# Altium PCB mcu_ecg_combine_board.PcbDoc
Units mm, origin at the board's own origin, x right, y up, seen from the top; angles counter-clockwise.
Board outline 38.86 x 39.12 mm, 2 copper layers (Top Layer, Bottom Layer); 5 components, 22 nets, 43 pads, 0 vias.
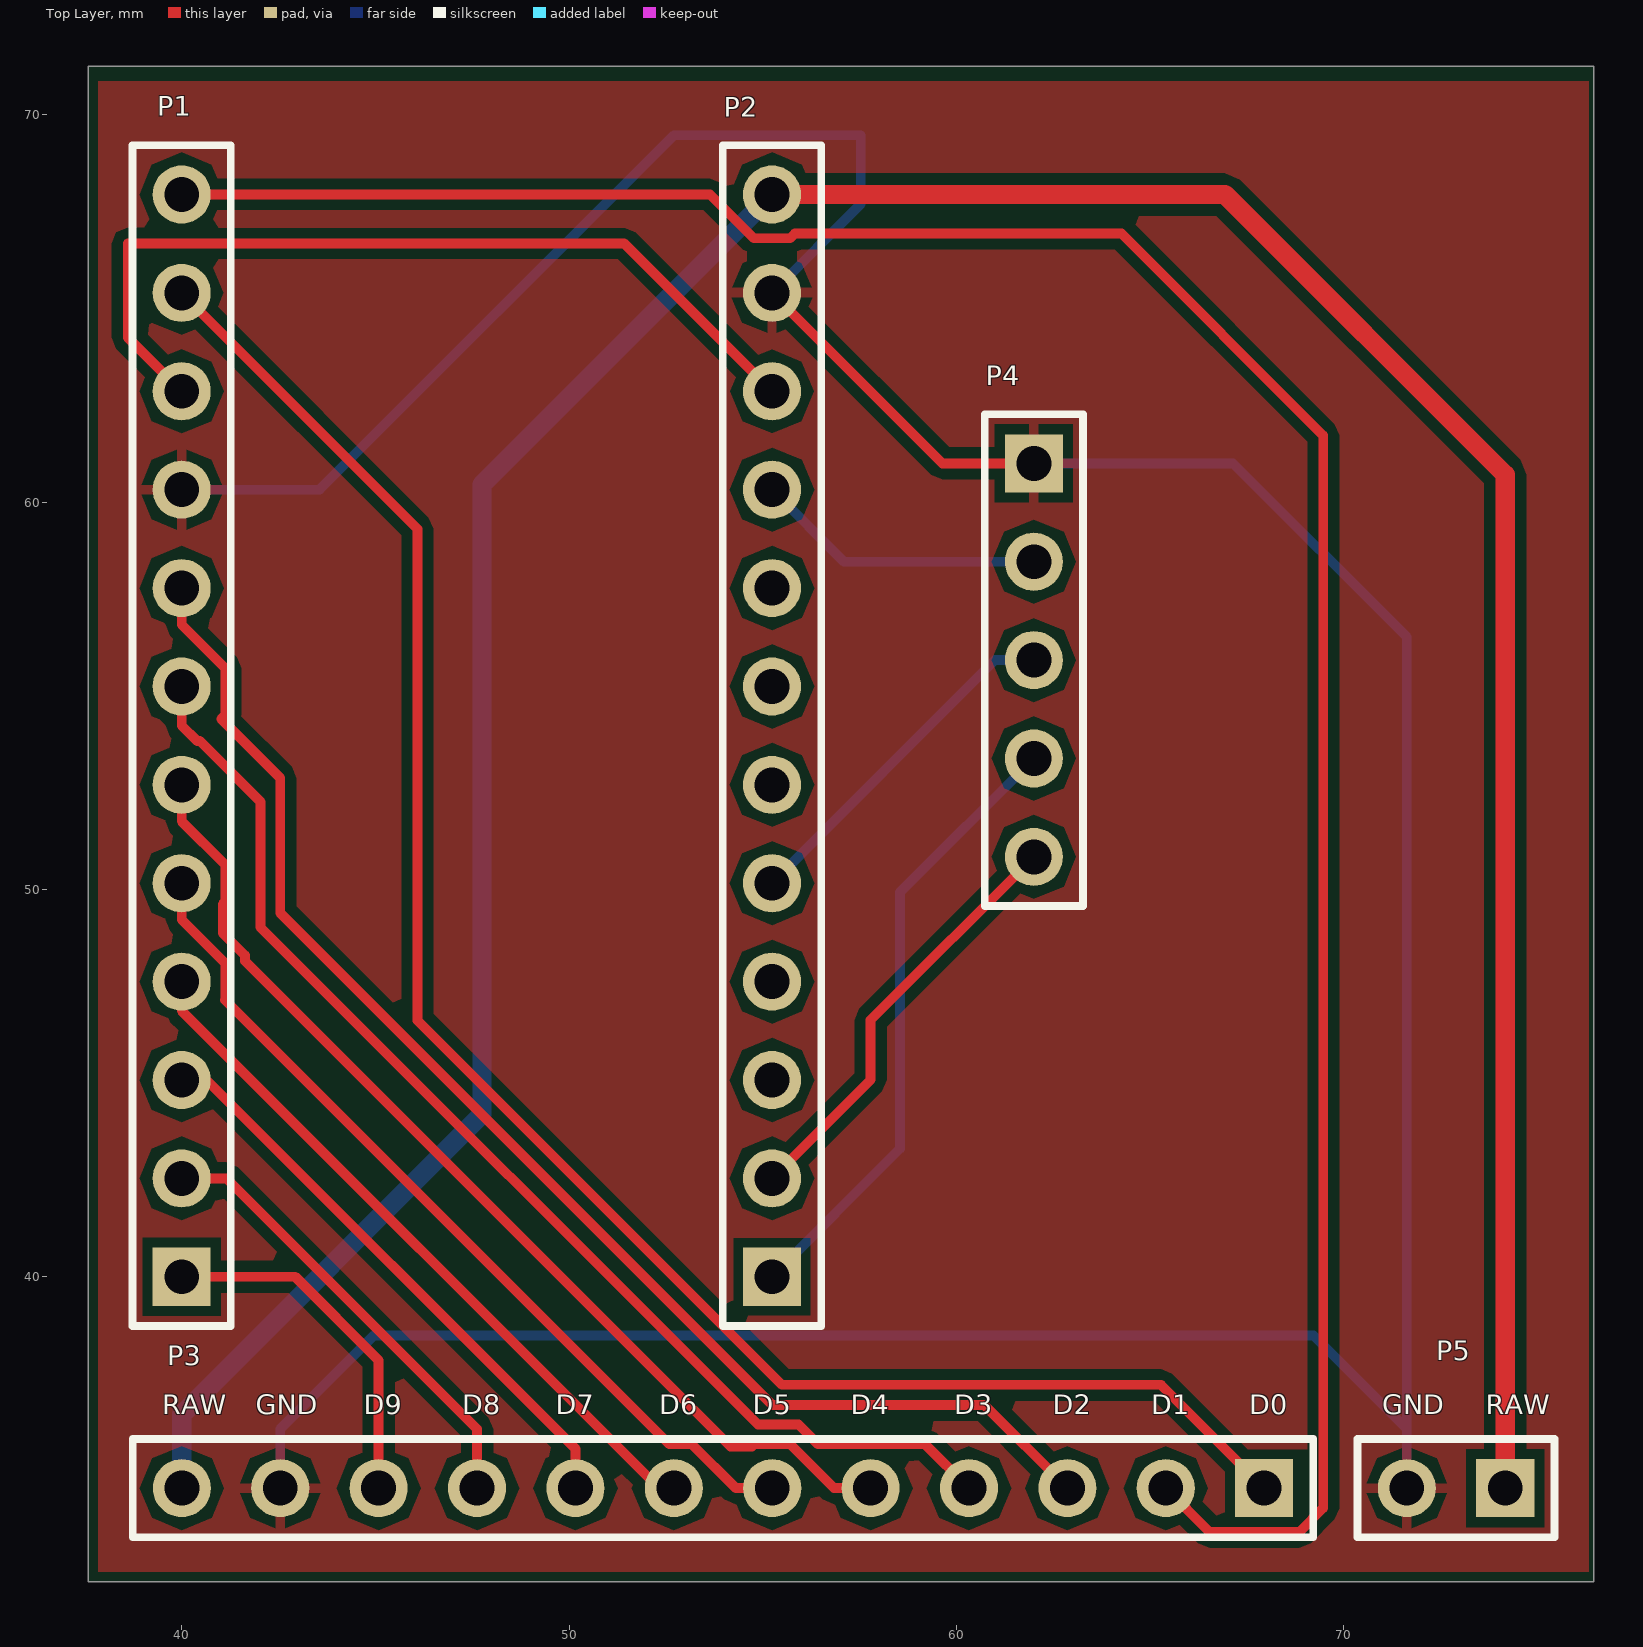
[diagram p0: Top Layer view]
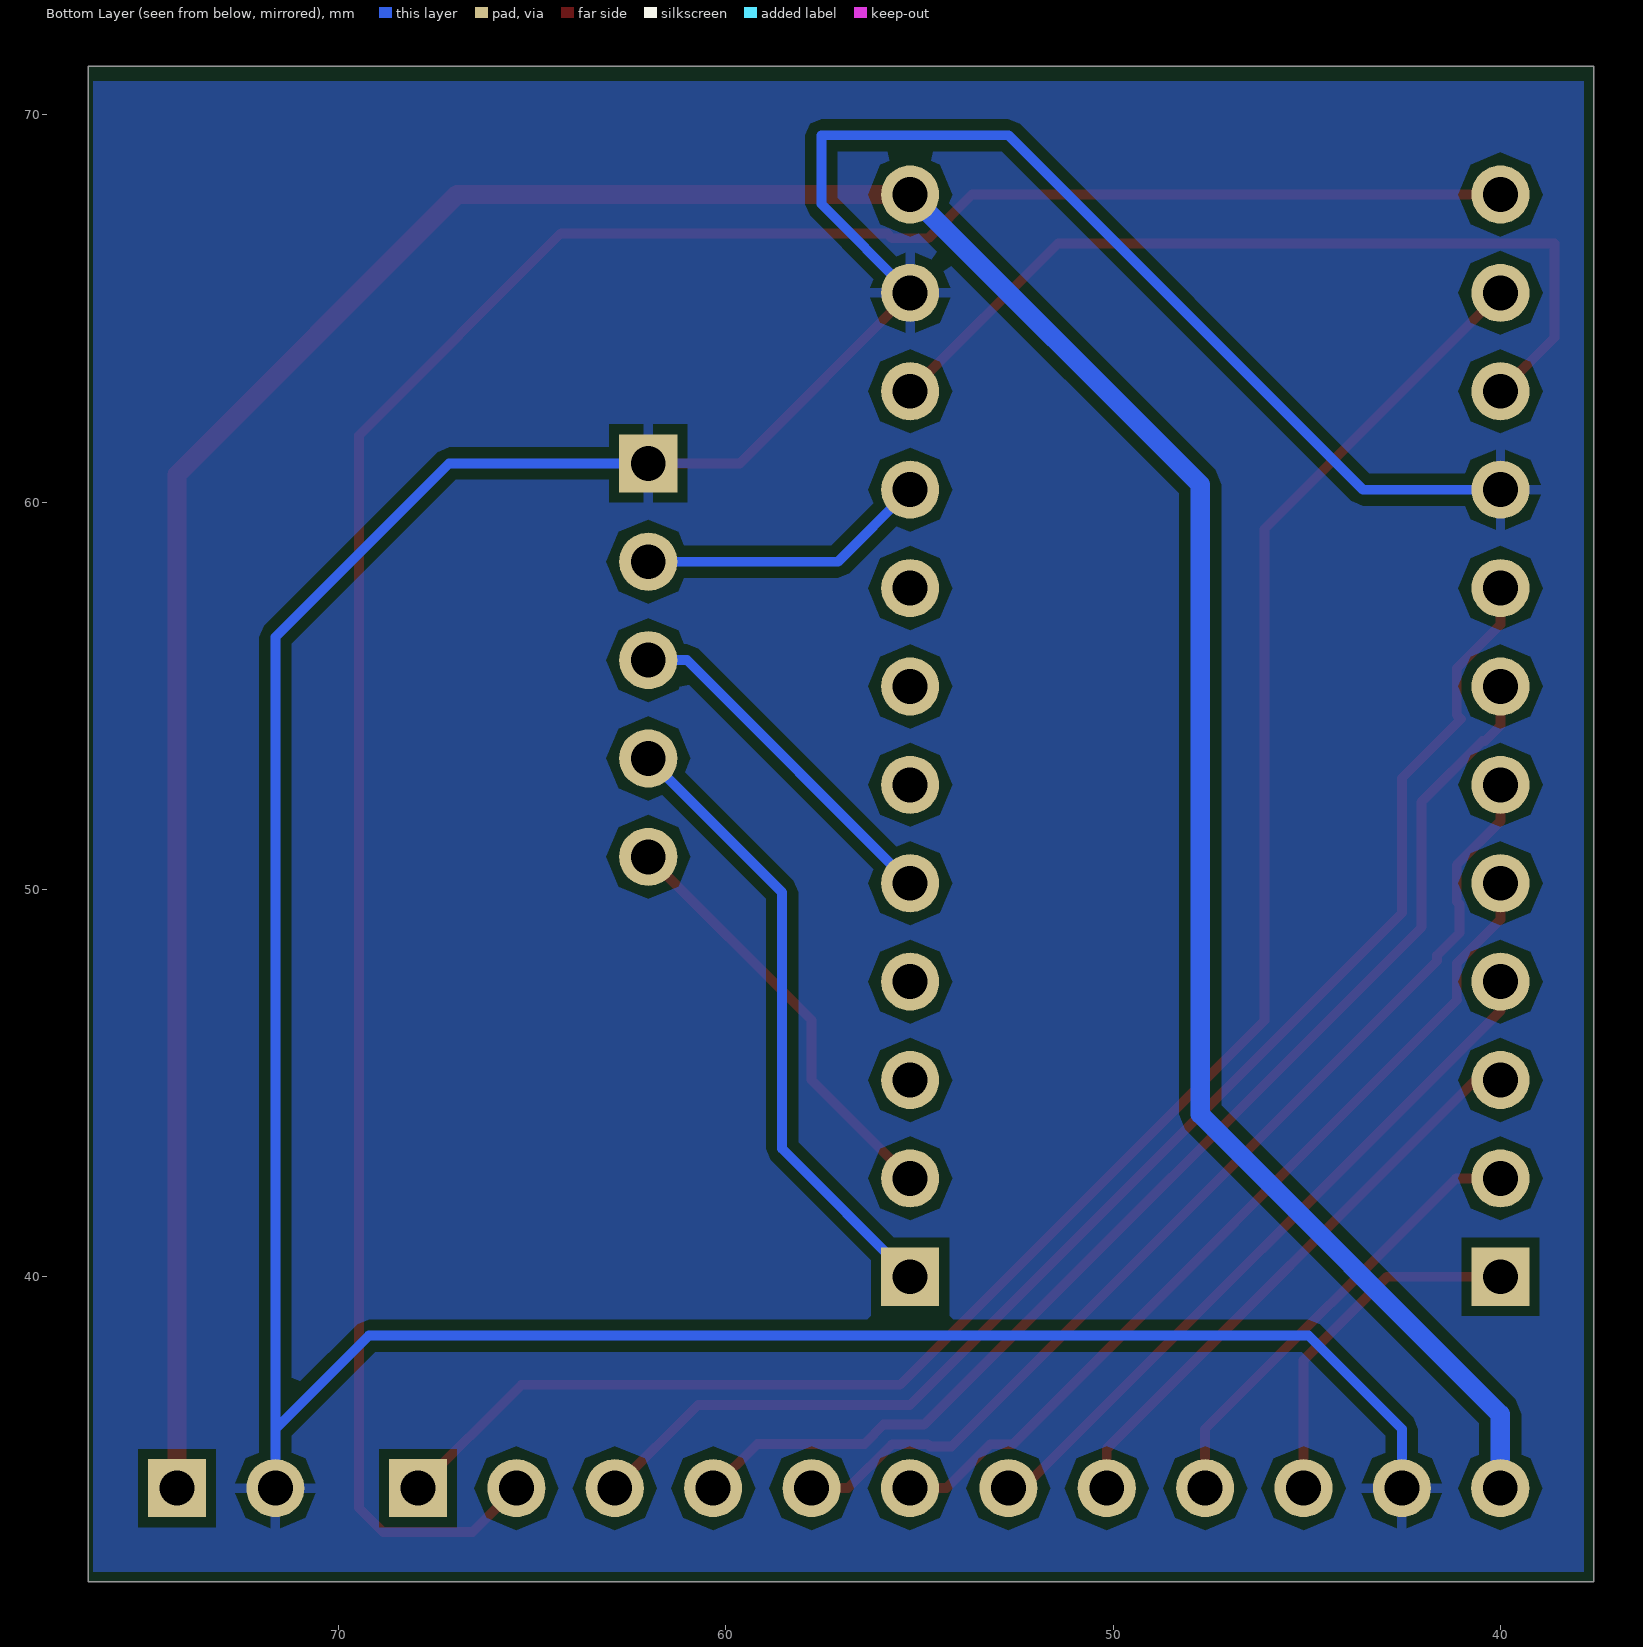
[diagram p1: Bottom Layer view, seen from below]

## Layer stack, top to bottom
Top Layer: signal copper 0.0356
Dielectric: dielectric 0.32, FR-4, Dk 4.8
Bottom Layer: signal copper 0.0356

## Board outline
37.592,71.247 37.592,32.131 76.454,32.131 76.454,71.247 37.592,71.247

## Design rules (kind name [scope] priority, off if disabled: settings)
Clearance [All] p1: gap=0.254
PolygonConnect [All] p1: connectstyle=Relief reliefconductorwidth=0.254 reliefentries=4 polygonreliefangle="90 Angle" airgapwidth=0.254
RoutingVias [All] p1: holewidth=0.711 width=1.27 viastyle="Through Hole" minholewidth=0.711 minwidth=1.27 maxholewidth=0.711 maxwidth=1.27
SolderMaskExpansion [All] p1: expansion=0.102
Width [All] p1: maxlimit=1 minlimit=0.254 preferedwidth=0.254
28 further rules are at their usual default settings.

## Components (designator, comment, footprint, x,y, rotation, side; value= is the part's Value field where it differs from the comment)
P1 "Header 12" HDR1X12 40,40 r90 top
P2 "Header 12" HDR1X12 55.24,40 r90 top
P3 "Header 12" HDR1X12 67.945,34.544 r180 top
P4 "Header 5" HDR1X5 62,61 r270 top
P5 "Header 2" HDR1X2 74.168,34.544 r180 top

## Footprints (in the part's own frame and the unit in brackets; to place one, negate y for a bottom-side part, rotate by r counter-clockwise, add the part's x,y. Pads: shape width x height; smd on the part's side, far side on the other; paste and mask are expansions set on the pad)
HDR1X2 [mm] "Connector; Header; 2 Position"
  rect 1.5x1.5 hole 0.9: 1(0,0)
  round 1.5 hole 0.9: 2(2.54,0)
  silkscreen extent -1.27,-1.27 3.81,1.27
HDR1X5 [mm] "Connector; Header; 5 Position"
  rect 1.5x1.5 hole 0.9: 1(0,0)
  round 1.5 hole 0.9: 2(2.54,0) 3(5.08,0) 4(7.62,0) 5(10.16,0)
  silkscreen extent -1.27,-1.27 11.43,1.27
HDR1X12 [mm] "Connector; Header; 12 Position"
  rect 1.5x1.5 hole 0.9: 1(0,0)
  round 1.5 hole 0.9: 2(2.54,0) 3(5.08,0) 4(7.62,0) 5(10.16,0) 6(12.7,0) 7(15.24,0) 8(17.78,0) 9(20.32,0) 10(22.86,0) 11(25.4,0) 12(27.94,0)
  silkscreen extent -1.27,-1.27 29.21,1.27

## Part data
P1 P2 P3: "Header, 12-Pin"
P4: "Header, 5-Pin"
P5: "Header, 2-Pin"

## Nets (pads, with @x,y where several pads share a name; then routed paths per layer and width w, separated by ;. In a path a pad name is that pad's centre, name@x,y a point inside that pad or via, vN(x,y) a via of type N, cw(c..) or ccw(c..) an arc to the next point about the centre after c; other vN are vias at no path point)
GND: P1.9 P2.11 P3.11 P4.1 P5.2 | length 101
  Top Layer w0.254: P2.11 59.64,61 P4.1
  Bottom Layer w0.254: P1.9 43.556,60.32 52.705,69.469 57.531,69.469 57.531,67.691 P2.11 ; P3.11 42.545,36.068 44.958,38.481 69.215,38.481 71.628,36.068 ; P4.1 67.143,61 71.628,56.515 71.628,36.068 ; P5.2 71.628,36.068
NetP1_1: P1.1 P3.10 | length 9.3
  Top Layer w0.254: P1.1 42.931,40 45.085,37.846 P3.10
NetP1_2: P1.2 P3.9 | length 11.8
  Top Layer w0.254: P1.2 41.153,42.54 47.625,36.068 P3.9
NetP1_3: P1.3 P3.8 | length 15.1
  Top Layer w0.254: P1.3 40.645,45.08 50.165,35.56 P3.8
NetP1_4: P1.4 P3.7 | length 18.6
  Top Layer w0.254: P1.4 40,46.868 52.324,34.544 P3.7
NetP1_5: P1.5 P3.6 | length 22.8
  Top Layer w0.254: P1.5 40,49.219 41.131,48.088 41.131,47.152 41.122,47.143 52.59,35.675 53.173,35.675 54.304,34.544 P3.6
NetP1_6: P1.6 P3.5 | length 27.1
  Top Layer w0.254: P1.6 40,51.759 41.131,50.628 41.131,49.692 41.059,49.619 41.059,48.879 41.639,48.299 41.639,48.15 54.169,35.62 54.721,35.62 54.777,35.675 55.713,35.675 56.844,34.544 P3.5
NetP1_7: P1.7 P3.4 | length 31.4
  Top Layer w0.254: P1.7 40,54.234 40.403,53.831 40.468,53.831 42.037,52.262 42.037,49.022 54.876,36.183 55.924,36.183 56.42,35.687 59.182,35.687 P3.4
NetP1_8: P1.8 P3.3 | length 36
  Top Layer w0.254: P1.8 40,56.839 41.131,55.708 41.131,54.509 41.021,54.399 42.545,52.875 42.545,49.391 55.245,36.691 60.718,36.691 P3.3
NetP1_10: P1.10 P2.10 | length 22.6
  Top Layer w0.254: P1.10 38.608,64.252 38.608,66.675 51.425,66.675 P2.10
NetP1_11: P1.11 P3.1 | length 48.2
  Top Layer w0.254: P1.11 46.091,59.309 46.091,46.619 55.499,37.211 65.278,37.211 P3.1
NetP1_12: P1.12 P3.2 | length 64.6
  Top Layer w0.254: P1.12 53.641,67.94 54.772,66.809 55.708,66.809 55.828,66.929 64.262,66.929 69.469,61.722 69.469,34.029 68.853,33.413 66.536,33.413 P3.2
NetP2_1: P2.1 P4.4 | length 16.2
  Bottom Layer w0.254: P2.1 58.547,43.307 58.547,49.927 P4.4
NetP2_2: P2.2 P4.5 | length 11.1
  Top Layer w0.254: P2.2 57.785,45.085 57.785,46.625 P4.5
NetP2_3: P2.3
NetP2_4: P2.4
NetP2_5: P2.5 P4.3 | length 9.1
  Bottom Layer w0.254: P2.5 61,55.92 P4.3
NetP2_6: P2.6
NetP2_7: P2.7
NetP2_8: P2.8
NetP2_9: P2.9 P4.2 | length 7.5
  Bottom Layer w0.254: P2.9 57.1,58.46 P4.2
NetP2_12: P2.12 P3.12 P5.1 | length 87.8
  Top Layer w0.5: P2.12 66.934,67.94 74.168,60.706 P5.1
  Bottom Layer w0.5: P3.12 40.005,36.449 47.752,44.196 47.752,60.452 P2.12

## Polygon pours and split planes (outlines as drawn)
GND on Top Layer "Bottom Layer-No Net" (solid, pour order 4): 37.846,70.866 37.846,32.385 76.327,32.385 76.327,70.866 37.846,70.866
GND on Bottom Layer "Bottom Layer-No Net" (solid, pour order 6): 37.846,70.866 37.846,32.385 76.327,32.385 76.327,70.866 37.846,70.866

## Silkscreen, mask and mechanical layers (free items; w line width, h text height)
Top Overlay:
  text "RAW" at 39.497,36.449 h0.51
  text "GND" at 41.91,36.449 h0.51
  text "D9" at 44.704,36.449 h0.51
  text "D8" at 47.244,36.449 h0.51
  text "D7" at 49.657,36.449 h0.51
  text "D6" at 52.324,36.449 h0.51
  text "D5" at 54.737,36.449 h0.51
  text "D4" at 57.277,36.449 h0.51
  text "D3" at 59.944,36.449 h0.51
  text "D2" at 62.484,36.449 h0.51
  text "D1" at 65.024,36.449 h0.51
  text "D0" at 67.564,36.449 h0.51
  text "GND" at 70.993,36.449 h0.51
  text "RAW" at 73.66,36.449 h0.51
Mechanical 1:
  lines w0.5: 37.592,32.131 76.581,32.131 76.581,71.12 37.592,71.12 37.592,32.131